# EAGLE board power_strip_monitor_V2 (EAGLE 6.4)
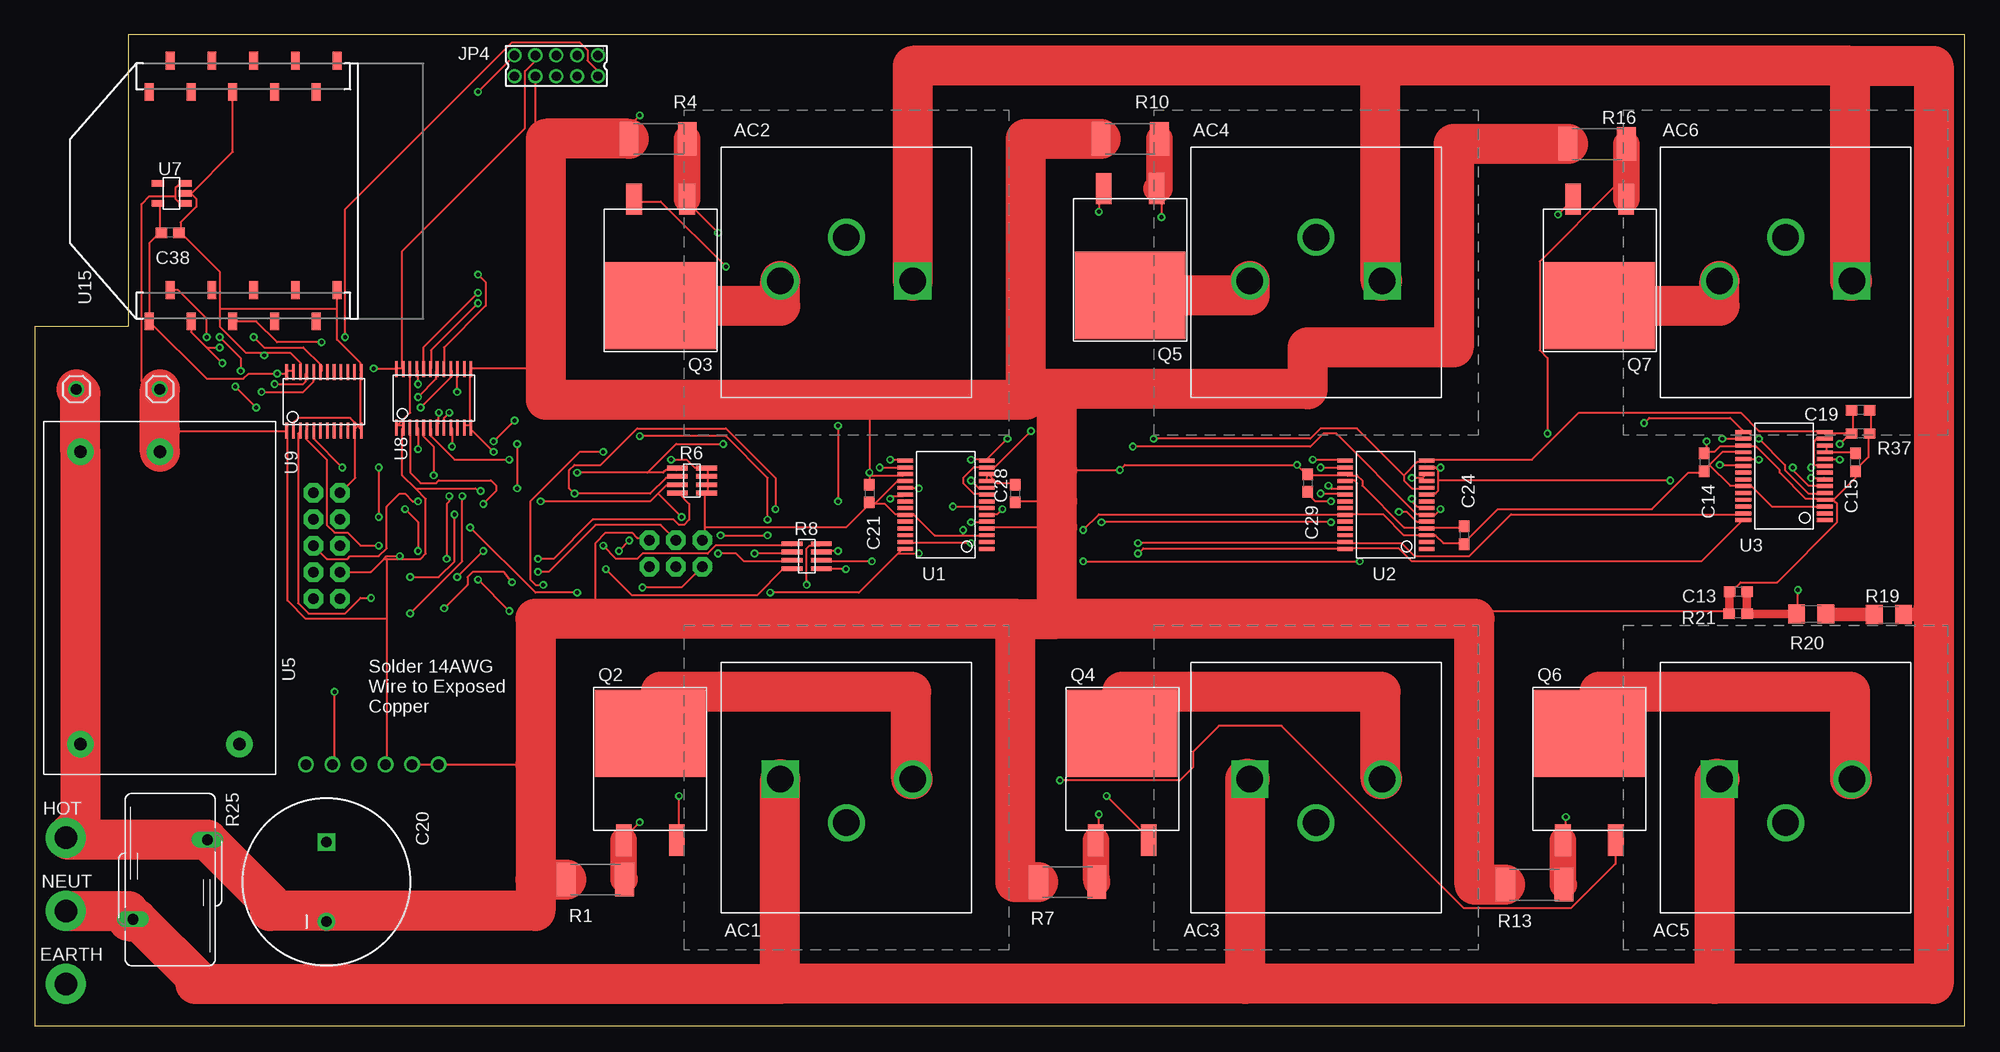
[diagram p0: board, top side]
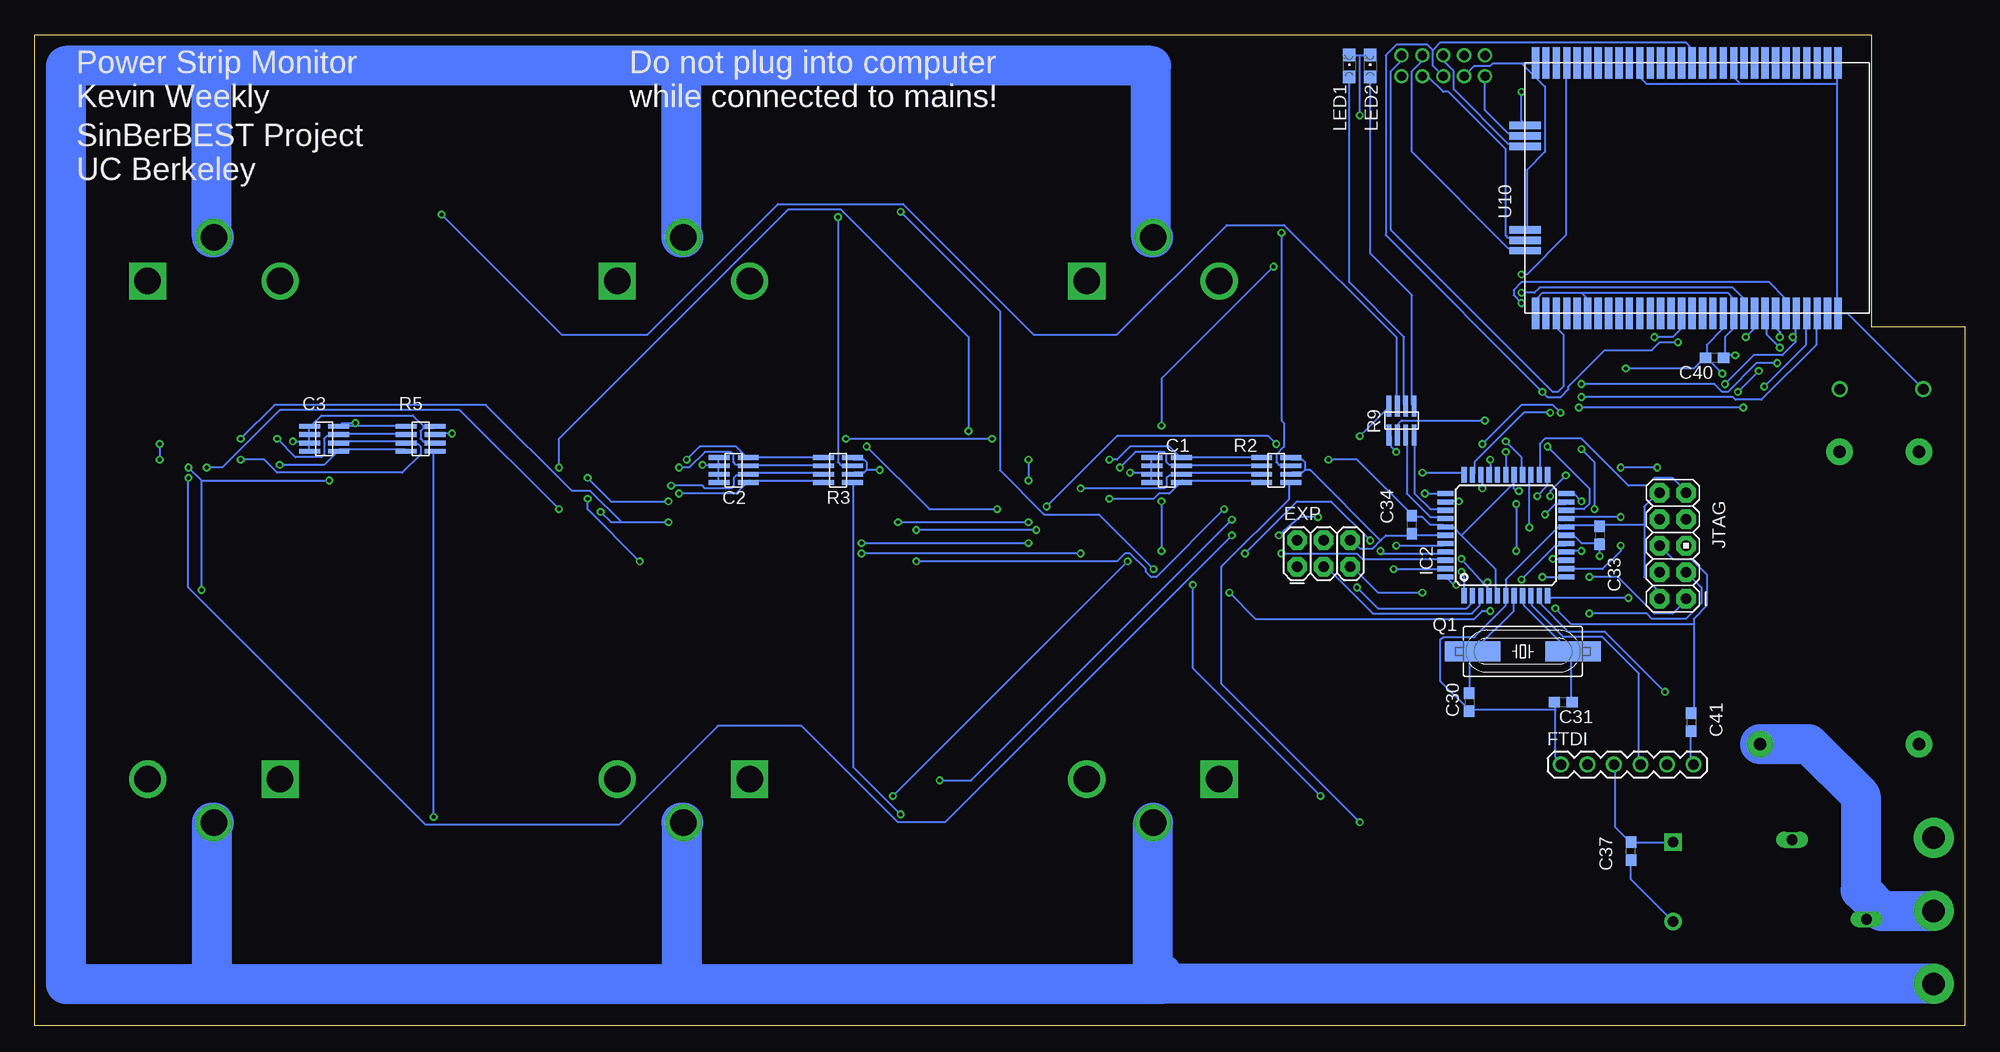
[diagram p1: board, bottom side, seen from below]

Size 185 x 95 mm. Coordinates in mm from the lower left corner, seen from the top.
Outline: 0,0 185,0 185,95 9,95 9,67 0,67 0,0
Copper layers (1+2*15+16): Top 0.0356mm / dielectric 0.2mm / GND 0.017mm / dielectric 1.5mm / VCC 0.017mm / dielectric 0.2007mm / Bottom 0.0356mm
Design rules "LaenPCBOrder *": minimum track width 6mil, minimum drill 13mil, track to track 6mil, track to pad 6mil, pad to pad 6mil, via to via 6mil, smd to smd 6mil, copper to edge 15mil, drill to drill 6mil, minimum pad ring 7mil, minimum via ring 7mil, stop-mask expansion 4mil, vias tented up to drill 0mil, thermal gap 10mil
Net classes: 0 default: width 0.203 mm, drill 0.381 mm, clearance 0.203 mm; 1 Evil_AC: width 0.254 mm, drill 0.381 mm, clearance 2.997 mm

## Footprints (pad centres in the part's own frame; a part is rotated, then mirrored left to right if it is on the bottom)
3-213598-2 = drill 2.54 square: 1 -6.35,0.813 | drill 2.54: 2 6.35,0.813; 3 0,-3.378
1206_NETWORK = smd 2 x 0.45: A1 -1.4,1.2; A2 1.4,1.2; B1 -1.4,0.4; B2 1.4,0.4; C1 -1.4,-0.4; C2 1.4,-0.4; D1 -1.4,-1.2; D2 1.4,-1.2
0603 = smd 1.1 x 1: 1 -0.85,0; 2 0.85,0
CPOL-RADIAL-1000UF-63V = drill 1.016 pad 1.651 square: 1 3.81,0 | drill 1.016 pad 1.676: 2 -3.81,0
14GAUGE_HOLE = drill 2.159 pad 3.81: P$1 0,0
2X3 = drill 1.016 pad 1.88 octagon: 1 0,0; 2 0,2.54; 3 2.54,0; 4 2.54,2.54; 5 5.08,0; 6 5.08,2.54
1X06 = drill 1.016: 1 0,0; 2 2.54,0; 3 5.08,0; 4 7.62,0; 5 10.16,0; 6 12.7,0
TQFP44 = smd 1.5 x 0.5: 1 -5.8,4; 2 -5.8,3.2; 3 -5.8,2.4; 4 -5.8,1.6; 5 -5.8,0.8; 6 -5.8,0; 7 -5.8,-0.8; 8 -5.8,-1.6; 9 -5.8,-2.4; 10 -5.8,-3.2; 11 -5.8,-4; 23 5.8,-4; 24 5.8,-3.2; 25 5.8,-2.4; 26 5.8,-1.6; 27 5.8,-0.8; 28 5.8,0; 29 5.8,0.8; 30 5.8,1.6; 31 5.8,2.4; 32 5.8,3.2; 33 5.8,4 | smd 0.5 x 1.5: 12 -4,-5.8; 13 -3.2,-5.8; 14 -2.4,-5.8; 15 -1.6,-5.8; 16 -0.8,-5.8; 17 0,-5.8; 18 0.8,-5.8; 19 1.6,-5.8; 20 2.4,-5.8; 21 3.2,-5.8; 22 4,-5.8; 34 4,5.8; 35 3.2,5.8; 36 2.4,5.8; 37 1.6,5.8; 38 0.8,5.8; 39 0,5.8; 40 -0.8,5.8; 41 -1.6,5.8; 42 -2.4,5.8; 43 -3.2,5.8; 44 -4,5.8
87758-1016 = drill 0.9 pad 1.27: 1 -4,-1; 2 -4,1; 3 -2,-1; 4 -2,1; 5 0,-1; 6 0,1; 7 2,-1; 8 2,1; 9 4,-1; 10 4,1
AVR_ICSP = drill 1.016 pad 1.88 octagon: 1 -1.27,5.08; 2 1.27,5.08; 3 -1.27,2.54; 4 1.27,2.54; 5 -1.27,0; 6 1.27,0; 7 -1.27,-2.54; 8 1.27,-2.54; 9 -1.27,-5.08; 10 1.27,-5.08
CHIPLED_0805 = smd 1.2 x 1.2: A 0,-1.05; C 0,1.05
HC49UP = smd 5.334 x 1.93: 1 -4.826,0; 2 4.826,0
D2PACK_NXP = smd 1.5 x 3: 1 -2.54,-10.225; 3 2.54,-10.225 | smd 10.6 x 8.35: 2 0,0
R2512 = smd 1.8 x 3.2: 1 -2.8,0; 2 2.8,0
1206 = smd 1.6 x 1.8: 1 -1.4,0; 2 1.4,0
S14K680 = drill 1.016 long: 1 -3.556,-3.81; 2 3.556,3.81
TESTPOINT-100MIL = drill 1.016: 2 0,0
SSOP28L_CIRRUS = smd 1.5 x 0.38: 1 -3.9,4.225; 2 -3.9,3.575; 3 -3.9,2.925; 4 -3.9,2.275; 5 -3.9,1.625; 6 -3.9,0.975; 7 -3.9,0.325; 8 -3.9,-0.325; 9 -3.9,-0.975; 10 -3.9,-1.625; 11 -3.9,-2.275; 12 -3.9,-2.925; 13 -3.9,-3.575; 14 -3.9,-4.225; 15 3.9,-4.225; 16 3.9,-3.575; 17 3.9,-2.925; 18 3.9,-2.275; 19 3.9,-1.625; 20 3.9,-0.975; 21 3.9,-0.325; 22 3.9,0.325; 23 3.9,0.975; 24 3.9,1.625; 25 3.9,2.275; 26 3.9,2.925; 27 3.9,3.575; 28 3.9,4.225
RAC01_02-SC = drill 1.2 pad 2.54: 1 -14,7.62; 2 -14,-7.62; 3 14,7.62; 4 14,0
TSOT23-5_LINEAR = smd 0.62 x 1.22: 1 -0.95,-1.31; 2 0,-1.31; 3 0.95,-1.31; 4 0.95,1.31; 5 -0.95,1.31
TSSOP24_TI = smd 1.55 x 0.25: 1 -2.8,3.575; 2 -2.8,2.925; 3 -2.8,2.275; 4 -2.8,1.625; 5 -2.8,0.975; 6 -2.8,0.325; 7 -2.8,-0.325; 8 -2.8,-0.975; 9 -2.8,-1.625; 10 -2.8,-2.275; 11 -2.8,-2.925; 12 -2.8,-3.575; 13 2.8,-3.575; 14 2.8,-2.925; 15 2.8,-2.275; 16 2.8,-1.625; 17 2.8,-0.975; 18 2.8,-0.325; 19 2.8,0.325; 20 2.8,0.975; 21 2.8,1.625; 22 2.8,2.275; 23 2.8,2.925; 24 2.8,3.575
LTP5901_MODULE = smd 3 x 0.7: 1 -12,13.5; 2 -12,12.5; 3 -12,11.5; 4 -12,10.5; 5 -12,9.5; 6 -12,8.5; 7 -12,7.5; 8 -12,6.5; 9 -12,5.5; 10 -12,4.5; 11 -12,3.5; 12 -12,2.5; 13 -12,1.5; 14 -12,0.5; 15 -12,-0.5; 16 -12,-1.5; 17 -12,-2.5; 18 -12,-3.5; 19 -12,-4.5; 20 -12,-5.5; 21 -12,-6.5; 22 -12,-7.5; 23 -12,-8.5; 24 -12,-9.5; 25 -12,-10.5; 26 -12,-11.5; 27 -12,-12.5; 28 -12,-13.5; 29 -12,-14.5; 30 -12,-15.5; 37 12,-15.5; 38 12,-14.5; 39 12,-13.5; 40 12,-12.5; 41 12,-11.5; 42 12,-10.5; 43 12,-9.5; 44 12,-8.5; 45 12,-7.5; 46 12,-6.5; 47 12,-5.5; 48 12,-4.5; 49 12,-3.5; 50 12,-2.5; 51 12,-1.5; 52 12,-0.5; 53 12,0.5; 54 12,1.5; 55 12,2.5; 56 12,3.5; 57 12,4.5; 58 12,5.5; 59 12,6.5; 60 12,7.5; 61 12,8.5; 62 12,9.5; 63 12,10.5; 64 12,11.5; 65 12,12.5; 66 12,13.5 | smd 0.7 x 3: 31 -6,-16.5; 32 -5,-16.5; 33 -4,-16.5; 34 4,-16.5; 35 5,-16.5; 36 6,-16.5
XBEE-SMD = smd 1.7 x 0.85: 1 -12.5,20; 2 -9.5,18; 3 -12.5,16; 4 -9.5,14; 5 -12.5,12; 6 -9.5,10; 7 -12.5,8; 8 -9.5,6; 9 -12.5,4; 10 -9.5,2; 11 12.5,2; 12 9.5,4; 13 12.5,6; 14 9.5,8; 15 12.5,10; 16 9.5,12; 17 12.5,14; 18 9.5,16; 19 12.5,18; 20 9.5,20

## Placement (x,y rotation side)
AC1  AC_OUTLET  [3-213598-2]  77.81,22.81 0 top
AC2  AC_OUTLET  [3-213598-2]  77.81,72.19 180 top
AC3  AC_OUTLET  [3-213598-2]  122.81,22.81 0 top
AC4  AC_OUTLET  [3-213598-2]  122.81,72.19 180 top
AC5  AC_OUTLET  [3-213598-2]  167.81,22.81 0 top
AC6  AC_OUTLET  [3-213598-2]  167.81,72.19 180 top
C1  10n  [1206_NETWORK]  76.5,53.25 180 bottom
C2  10n  [1206_NETWORK]  118,53.25 180 bottom
C3  10n  [1206_NETWORK]  157.25,56.25 180 bottom
C13  10n  [0603]  163.29,41.57 180 top
C14  .1u  [0603]  160,54 270 top
C15  .1u  [0603]  174.5,54 90 top
C19  10n  [0603]  175,59 180 top
C20  1000uF 10V  [CPOL-RADIAL-1000UF-63V]  27.97,13.79 90 top
C21  .1u  [0603]  80,51 270 top
C24  .1u  [0603]  137,47 270 top
C28  .1u  [0603]  94,51 90 top
C29  .1u  [0603]  122,52 270 top
C30  22p  [0603]  47.5,31 270 bottom
C31  22p  [0603]  38.5,31 180 bottom
C33  .1u  [0603]  35,47 270 bottom
C34  .1u  [0603]  53,48 90 bottom
C37  10u  [0603]  32.01,16.73 90 bottom
C38  10u  [0603]  13,76 180 top
C40  .1u  [0603]  24,64 180 bottom
C41  .1u  [0603]  26.24,29.09 270 bottom
EARTH  1P_HOLE  [14GAUGE_HOLE]  3,4 0 top
EXP  EXP  [2X3]  64,44 0 bottom
FTDI  [1X06]  38.71,25.02 0 bottom
HOT  1P_HOLE  [14GAUGE_HOLE]  3,18 0 top
IC2  ATMEGA644A  [TQFP44]  44,47 90 bottom
JP4  87758-1016  [87758-1016]  50,92 180 top
JTAG  JTAG  [AVR_ICSP]  28,46 180 bottom
LED1  [CHIPLED_0805]  59,92 0 bottom
LED2  [CHIPLED_0805]  57,92 0 bottom
NEUT  1P_HOLE  [14GAUGE_HOLE]  3,11 0 top
Q1  16.384MHz  [HC49UP]  42.37,35.87 180 bottom
Q2  BTA312B-800E  [D2PACK_NXP]  59,28 0 top
Q3  BTA312B-800E  [D2PACK_NXP]  60,69 180 top
Q4  BTA312B-800E  [D2PACK_NXP]  104.25,28 0 top
Q5  BTA312B-800E  [D2PACK_NXP]  105,70 180 top
Q6  BTA312B-800E  [D2PACK_NXP]  149,28 0 top
Q7  BTA312B-800E  [D2PACK_NXP]  150,69 180 top
R1  1m 1%  [R2512]  53.75,14 0 top
R2  220 1%  [1206_NETWORK]  66,53.25 180 bottom
R3  220 1%  [1206_NETWORK]  108,53.25 180 bottom
R4  1m 1%  [R2512]  59.75,85 0 top
R5  220 1%  [1206_NETWORK]  148,56.25 180 bottom
R6  10k  [1206_NETWORK]  63,52.25 0 top
R7  1m 1%  [R2512]  99,13.75 0 top
R8  100  [1206_NETWORK]  74,45 0 top
R9  100  [1206_NETWORK]  54,58 90 bottom
R10  1m 1%  [R2512]  105,85 0 top
R13  1m 1%  [R2512]  143.75,13.5 0 top
R16  1m 1%  [R2512]  149.75,84.5 0 top
R19  470k 200V  [1206]  177.71,39.4 0 top
R20  470k 200V  [1206]  170.26,39.45 180 top
R21  1k 1%  [0603]  163.25,39.5 180 top
R25  S14K680  [S14K680]  13,14 180 top
R37  1k 1%  [0603]  175,56.75 180 top
TP21  TESTPOINT100MIL  [TESTPOINT-100MIL]  12,61 0 top
TP24  TESTPOINT100MIL  [TESTPOINT-100MIL]  4,61 0 top
U1  CS5467  [SSOP28L_CIRRUS]  87.34,49.93 180 top
U2  CS5467  [SSOP28L_CIRRUS]  129.5,49.93 180 top
U3  CS5467  [SSOP28L_CIRRUS]  167.66,52.68 180 top
U5  RAC01_02-SC  [RAC01_02-SC]  12,41 90 top
U7  LT1761ES5-3.3  [TSOT23-5_LINEAR]  13.13,79.76 90 top
U8  SN74LVC4245A  [TSSOP24_TI]  38.26,60.14 90 top
U9  SN74LVC4245A  [TSSOP24_TI]  27.74,59.83 90 top
U10  LTP5901  [LTP5901_MODULE]  25.66,80.28 270 bottom
U15  XBEE-1B3  [XBEE-SMD]  31,80 90 top

## Library data of the parts
AC1-AC6 C1-C3 EARTH HOT NEUT Q2-Q7 R2 R3 R5 R6 R8 R9 U1-U3 U5 U7-U10 = Cool_Electricity
C13-C15 C19 C21 C24 C28-C31 C33 C34 C37 C38 C40 C41 Q1 R19-R21 R37 = SparkFun
C20 = SparkFun-Passives
EXP JTAG = SparkFun-Connectors
FTDI = custom
IC2 = atmel; MPN: ATMEGA644PV-10AU; OC_FARNELL: 1455123; OC_NEWARK: 58M3748
JP4 = con-molex; MF: MOLEX; MPN: 87758-1016; OC_FARNELL: 7472340; OC_NEWARK: 59J1558
LED1 LED2 = led
R1 R4 R7 R10 R13 R16 = rcl
R25 = varistor
TP21 TP24 = WSNlib
U15 = SparkFun-RF; PROD_ID: CONN-09042

## Nets
3.3V: C38.2 C40.2 JP4.7 U7.5 U8.23 U8.24 U9.23 U9.24 U10.55 U15.1
5V: C14.2 C20.1 C21.2 C24.2 C33.2 C34.2 C37.2 EXP.2 FTDI.3 IC2.5 IC2.17 IC2.27 IC2.38 JTAG.4 R6.A2 R6.B2 R6.C2 R6.D2 TP21.2 U1.3 U1.18 U1.23 U2.3 U2.18 U2.23 U3.3 U3.18 U3.23 U5.4 U7.1 U7.3 U8.1 U8.2 U8.22 U9.1
#CS1: IC2.33 R6.A1 U1.7
#CS2: IC2.34 R6.B1 U2.7
#CS3: IC2.35 R6.C1 U3.7
#CS_EXP: EXP.5 IC2.25
ATMEGA_TO_FTDI: FTDI.5 IC2.10
ATMEGA_TO_MOTE_3V: U8.21 U10.59 U15.3
ATMEGA_TO_MOTE_5V: IC2.12 U8.3
EARTH: AC1.3 AC2.3 AC3.3 AC4.3 AC5.3 AC6.3 EARTH.P$1
EXP_MISO: EXP.1 IC2.2
EXP_MOSI: EXP.4 IC2.1
EXP_SCK: EXP.3 IC2.3
FLASH_P_ENN: JP4.2 U10.51
FTDI_TO_ATMEGA: FTDI.4 IC2.9
GATE1: Q2.3 R8.A2
GATE2: Q3.3 R8.B2
GATE3: Q4.3 R8.C2
GATE4: Q5.3 R8.D2
GATE5: Q6.3 R9.A2
GATE6: Q7.3 R9.B2
GND: C1.A2 C1.B2 C1.C2 C1.D2 C2.A2 C2.B2 C2.C2 C2.D2 C3.A2 C3.B2 C3.C2 C3.D2 C13.2 C14.1 C15.1 C19.1 C20.2 C21.1 C24.1 C28.1 C29.1 C30.2 C31.2 C33.1 C34.1 C37.1 C38.1 C40.1 EXP.6 FTDI.1 FTDI.2 HOT.P$1 IC2.6 IC2.18 IC2.28 IC2.39 JP4.8 JTAG.2 JTAG.10 LED1.C LED2.C R1.1 R2.B1 R2.D1 R3.B1 R3.D1 R4.1 R5.B1 R5.D1 R7.1 R10.1 R13.1 R16.1 R21.2 R25.1 R37.1 TP24.2 U1.4 U1.17 U2.4 U2.17 U3.4 U3.17 U5.1 U5.3 U7.2 U8.11 U8.12 U8.13 U9.2 U9.11 U9.12 U9.13 U9.22 U10.1 U10.11 U10.20 U10.30 U10.34 U10.37 U10.42 U10.56 U10.66 U15.10 U15.16
HOT1: AC1.2 Q2.2
HOT2: AC2.2 Q3.2
HOT3: AC3.2 Q4.2
HOT4: AC4.2 Q5.2
HOT5: AC5.2 Q6.2
HOT6: AC6.2 Q7.2
HRET1: Q2.1 R1.2 R2.A1
HRET2: Q3.1 R2.C1 R4.2
HRET3: Q4.1 R3.A1 R7.2
HRET4: Q5.1 R3.C1 R10.2
HRET5: Q6.1 R5.A1 R13.2
HRET6: Q7.1 R5.C1 R16.2
I1+: C1.A1 R2.A2 U1.20
I1-: C1.B1 R2.B2 U1.19
I2+: C1.C1 R2.C2 U1.16
I2-: C1.D1 R2.D2 U1.15
I3+: C2.A1 R3.A2 U2.20
I3-: C2.B1 R3.B2 U2.19
I4+: C2.C1 R3.C2 U2.16
I4-: C2.D1 R3.D2 U2.15
I5+: C3.A1 R5.A2 U3.20
I5-: C3.B1 R5.B2 U3.19
I6+: C3.C1 R5.C2 U3.16
I6-: C3.D1 R5.D2 U3.15
IPCS_MISO: JP4.5 U10.33
IPCS_MOSI: JP4.4 U10.35
IPCS_SCK: JP4.3 U10.36
IPCS_SSN: JP4.1 U10.39
LED1: LED1.A R9.C2
LED2: LED2.A R9.D2
MISO: U1.6 U2.6 U3.6
MOSI: U1.27 U2.27 U3.27
MOTE_CLI_RX: JP4.10 U10.32
MOTE_CLI_TX: JP4.9 U10.31
MOTE_RADIO_INHIBIT_3V: U8.18 U10.64
MOTE_RADIO_INHIBIT_5V: IC2.30 U8.6
MOTE_RESETN_3V: JP4.6 U8.15 U10.15 U15.5
MOTE_RESETN_5V: IC2.20 U8.9
MOTE_RX_CTSN_3V: U9.19 U10.58
MOTE_RX_CTSN_5V: IC2.19 U9.5
MOTE_RX_RTSN_3V: U8.20 U10.57
MOTE_RX_RTSN_5V: IC2.15 U8.4
MOTE_SLEEPN_3V: U8.17 U10.27
MOTE_SLEEPN_5V: IC2.31 U8.7
MOTE_TIMEN_3V: U8.16 U10.63
MOTE_TIMEN_5V: IC2.32 U8.8
MOTE_TO_ATMEGA_3V: U9.21 U10.62 U15.2
MOTE_TO_ATMEGA_5V: IC2.11 U9.3
MOTE_TX_CTSN_3V: U8.19 U10.61
MOTE_TX_CTSN_5V: IC2.14 U8.5
MOTE_TX_RTSN_3V: U9.20 U10.60
MOTE_TX_RTSN_5V: IC2.13 U9.4
N$1: C30.1 IC2.7 Q1.2
N$2: R19.1 R20.1
N$3: C31.1 IC2.8 Q1.1
N$4: C15.2 U3.11 U3.12
N$6: IC2.40 R8.A1
N$7: IC2.41 R8.B1
N$8: IC2.42 R8.C1
N$10: IC2.43 R8.D1
N$11: C29.2 U2.11 U2.12
N$12: IC2.44 R9.A1
N$13: IC2.26 R9.B1
N$14: IC2.36 R9.D1
N$15: C28.2 U1.11 U1.12
N$16: IC2.37 R9.C1
NEUTRAL [Evil_AC]: AC1.1 AC2.1 AC3.1 AC4.1 AC5.1 AC6.1 NEUT.P$1 R19.2 R25.2 U5.2
RST: C41.1 IC2.4 JTAG.6 R6.D1
RTS#: C41.2 FTDI.6
SCLK: U1.5 U2.5 U3.5
TCK: IC2.21 JTAG.1
TDI: IC2.24 JTAG.9
TDO: IC2.23 JTAG.3
TMS: IC2.22 JTAG.5
V+: C13.1 R20.2 R21.1 U1.9 U1.13 U2.9 U2.13 U3.9 U3.13
V-: C19.2 R37.2 U1.10 U1.14 U2.10 U2.14 U3.10 U3.14
XIN: IC2.16 U1.28 U2.28 U3.28

## Tracks (layer width: path | path; a pad name or v marks a point on that pad's centre or on a via)
3.3V  (via drill 0.38)
  Top 0.203: U9.23 24.75,62.75 24.25,62.75 U9.24 24.25,62.5 v23.25,62.5 20.5,62.5 20,62 16.5,62 U15.1 11,75 12,76 | 12,76 12,78.75 U7.5 | 12,76 C38.2 | 35.25,63 34.75,63 | v32.5,63 34.75,63 | 34.75,63 U8.24 | JP4.7 48,92.5 47,91.5 47,86 35.25,74.25 35.25,63 | 35.25,63 U8.23
  Bottom 0.203: 24.75,64 24.75,65.25 23.25,66.75 23.25,68.25 U10.55 | v32.5,63 26,63 25,64 C40.2 24.75,64 | 24.75,64 v23.25,62.5
5V  (via drill 0.38)
  Top 0.203: 160.5,53.75 161.75,55 163.75,55 U3.18 | 160.5,53.75 160,53.25 C14.2 160,53 158.5,53 155,49.5 140.25,49.5 137,46.25 | 160.5,53.75 162.5,51.75 163.75,51.75 U3.23 164,51.75 164.5,51.75 166.5,49.75 171.5,49.75 U3.3 | 137,46.25 135,46.25 134.25,47 133.5,47 U2.3 133.25,47 131.25,47 129.25,49 126.75,49 | 126.75,49 125.75,49 U2.23 125.5,49 102,49 v100.5,47.5 | 126.75,49 126.75,52 126.5,52.25 125.75,52.25 U2.18 | 137,46.25 C24.2 | 64.25,47.75 64.25,47 64,46.75 EXP.2 | 64.25,47.75 64.25,51 R6.D2 64.5,51.25 64.5,51.75 R6.C2 64.5,52 64.5,52.5 R6.B2 64.5,52.75 64.5,53.25 R6.A2 64.25,53.5 63.25,53.5 62.5,54.25 v61,54.25 | 80.5,50 81.5,50 82.5,49 83.25,49 U1.23 83.5,49 84.25,49 86.25,47 89,47 | 80.5,50 80,50 | 80.5,50 82.75,52.25 83.25,52.25 U1.18 | 89,47 91,47 U1.3 | 64.25,47.75 77.75,47.75 80,50 | 80,50 C21.2 | 13.5,79.5 13.5,80.25 13.75,80.5 14.25,80.5 U7.3 | 13.5,79.5 13.5,79.25 13.75,79 14.25,79 U7.1 | 12,57 24.25,57 | 13.5,79.5 11,79.5 10.25,78.75 10.25,61.75 TP21.2 | 34.75,57.5 35.25,57.5 U8.2 35.25,57.25 35.25,52.75 36.5,51.5 | 34.75,57.5 36,58.75 36,62.75 U8.22 | 34.75,57.5 U8.1 | v35,45 33.75,45 33.5,44.75 | 33.5,44.75 32.25,43.5 29.5,43.5 JTAG.4 | 36.5,51.5 37.5,50.5 37.5,45.25 37,44.75 33.75,44.75 | 33.5,44.75 33.75,44.75 | 33.75,44.75 33.75,39 | 33.75,39 33.75,25.25 FTDI.3 | 36.5,51.5 42.25,51.5 42.5,51.25 v42.75,51.25 | 24.25,57 24.25,40.75 26,39 33.75,39 | 24.25,57 U9.1 | 89,47 v89,47.5
  Top 3.81: U5.4 12,57 TP21.2
  Bottom 0.203: 48.25,47 49,47.75 49.75,47.75 IC2.38 50,48 51.25,48 52,48.75 53,48.75 C34.2 53,49 58.25,54.25 v61,54.25 | 48.25,47 45,43.75 45,41.25 IC2.5 | 43.25,52 43.25,52.75 IC2.27 | 48.25,47 43.25,52 | C20.1 28,17.5 32,17.5 C37.2 32.25,17.75 33.5,19 33.5,25 FTDI.3 | IC2.17 37.5,47 36.75,46.25 35,46.25 C33.2 v35,45 | v42.75,51.25 43,51.25 43.25,51.5 43.25,52 | v89,47.5 v100.5,47.5
#CS1  (via drill 0.38)
  Top 0.203: 58.75,53 60.25,53 60.5,53.25 61.5,53.25 R6.A1 | 58.75,53 v52,53 | v88,49.75 91,49.75 U1.7 | v66,55.75 61.5,55.75 58.75,53
  Bottom 0.203: v52,53 48,53 IC2.33 | v88,49.75 81.25,56.5 66.75,56.5 v66,55.75
#CS2  (via drill 0.38)
  Top 0.203: R6.B1 61.5,52.5 60.5,52.5 59,51 v51.75,51 51.25,51.5 51.25,53.25 51.75,53.75 54.25,53.75 57.75,57.25 66.25,57.25 71,52.5 v71,49.5 | v132,50.5 132,50.25 132.5,49.75 133.25,49.75 U2.7 | v100.5,44.5 v127,44.5
  Bottom 0.203: v51.75,51 IC2.34 | v132,50.5 132,49.5 v127,44.5 | v100.5,44.5 81.25,44.5 80.5,45.25 80,45.25 78.5,43.75 78.5,43.5 78,43 77.5,43 v71,49.5
#CS3  (via drill 0.38)
  Top 0.203: v48.5,50.25 59,50.25 59.75,51 | 59.75,51 60.5,51.75 61.5,51.75 R6.C1 | v170.25,52.5 171.5,52.5 U3.7 | v65.75,47 v70.25,47 | 59.75,51 v62,48.75
  Bottom 0.203: v48.5,50.25 49.75,50.25 IC2.35 | v170.25,52.5 170.25,42 147.5,19.25 129,19.25 119.5,28.75 111.5,28.75 102.25,19.5 97.75,19.5 v70.25,47 | v65.75,47 63.75,48.75 v62,48.75
#CS_EXP  (via drill 0.38)
  Top 0.203: v41.75,47.75 48,41.5 v52,41.5
  Bottom 0.203: v41.75,47.75 41.75,52.75 IC2.25 | v52,41.5 56.25,41.5 58.75,44 EXP.5
ATMEGA_TO_FTDI  (via drill 0.38)
  Top 0.203: v28.75,32 28.75,25.25 FTDI.5
  Bottom 0.203: v28.75,32 34.5,37.75 38,37.75 40.75,40.5 40.75,41 IC2.10
ATMEGA_TO_MOTE_3V  (via drill 0.38)
  Top 0.203: v36.75,61.5 36.75,62.75 U8.21 | 16.5,65 15,66.5 U15.3 | 16.5,65 v18,63.5 | 16.5,65 v17.75,65
  Bottom 0.203: v36.75,61.5 24,61.5 23.25,60.75 22.75,60.75 20,63.5 v18,63.5 | v17.75,65 19,66.25 19,68.25 U10.59
ATMEGA_TO_MOTE_5V  (via drill 0.38)
  Top 0.203: v43,45.5 v40.5,43 | v43,50 44.25,51.25 44.25,51.75 43.75,52.25 38.75,52.25 38.5,52 37,52 36,53 36,57.25 U8.3
  Bottom 0.203: v40.5,43 IC2.12 | v43,50 v43,45.5
EARTH
  Bottom 3.81: EARTH.P$1 77.81,4 77.81,5 | 77.81,5 AC1.3 | AC3.3 123,19.44 123,4 | 168,4 123,4 | 123,4 77,4 77,5 77.81,5 | AC5.3 168,19.44 168,4 | AC6.3 168,75.56 168,92 | 168,92 182,92 182,4 168,4 | AC4.3 123,75.56 123,92 | 123,92 168,92 | AC2.3 78,75.56 78,92 123,92
EXP_MISO  (via drill 0.38)
  Top 0.203: v58.25,42 62,42 EXP.1
  Bottom 0.203: v58.25,42 56.25,40 47.75,40 47.25,40.5 47.25,41 IC2.2
EXP_MOSI  (via drill 0.38)
  Top 0.203: v48.25,43.5 49.25,43.5 53.75,48 60,48 EXP.4
  Bottom 0.203: IC2.1 48,43 v48.25,43.5
EXP_SCK
  Bottom 0.203: IC2.3 46.5,41 46.5,40.25 47.25,39.5 56.75,39.5 61.25,44 EXP.3
FLASH_P_ENN  (via drill 0.38)
  Top 0.203: JP4.2 54,91.5 53,92.5 53,93.5 52.25,94.25 45.75,94.25 29.75,78.25 v29.75,66
  Bottom 0.203: v29.75,66 28,66 27.25,66.75 27.25,68.25 U10.51
FTDI_TO_ATMEGA
  Bottom 0.203: IC2.9 41.5,41 41.5,40.25 38.5,37.25 34.75,37.25 31.25,33.75 31.25,25.25 FTDI.4
GATE1  (via drill 0.38)
  Top 0.203: v74,42.25 74,45.75 74.25,46 75.25,46 R8.A2 | v61.75,22 61.75,18 Q2.3
  Bottom 0.203: v74,42.25 74,34.25 v61.75,22
GATE2  (via drill 0.38)
  Top 0.203: v77,45.5 75.5,45.5 R8.B2 | v77,57.5 v77,50.25 | v66.25,72.75 60,79 57.5,79 Q3.3
  Bottom 0.203: v77,50.25 v77,45.5 | v77,57.5 77,62 v66.25,72.75
GATE3  (via drill 0.38)
  Top 0.203: v80.25,44.5 75.5,44.5 R8.C2 | v102.75,22 106.75,18 Q4.3
  Bottom 0.203: v102.75,22 v80.25,44.5
GATE4  (via drill 0.38)
  Top 0.203: v77.75,43.75 75.5,43.75 R8.D2 | v102,78 102,79.75 102.25,80 Q5.3
  Bottom 0.203: v77.75,43.75 83,49 88.25,49 92.5,53.25 92.5,68.5 v102,78
GATE5  (via drill 0.38)
  Top 0.203: v58,56.5 66.25,56.5 70.25,52.5 v70.25,48.5 | v98.25,23.5 109.75,23.5 111,24.75 111,26.25 113.5,28.75 119.5,28.75 137,11.25 147.25,11.25 151.5,15.5 151.5,17.75 Q6.3
  Bottom 0.203: v58,56.5 55.25,59.25 R9.A2 | v70.25,48.5 95.25,23.5 v98.25,23.5
GATE6  (via drill 0.38)
  Top 0.203: v146,77.75 147.25,79 Q7.3
  Bottom 0.203: v146,77.75 134.5,66.25 126.25,66.25 113.75,78.75 101.75,78.75 89.25,66.25 81.25,66.25 70.75,76.75 65.25,76.75 54.5,66 54.5,59.5 R9.B2
GND  (via drill 0.38)
  Top 0.203: 31.25,57.25 31,57.5 | 31,57.5 30.25,58.25 25.25,58.25 24.75,57.75 24.75,57.25 U9.2 | 31,57.5 30.75,57.25 U9.11 30.75,57 30.75,52.5 29.5,51.25 JTAG.10 | 31.25,57.25 31.25,62.5 U9.13 31.25,62.75 31.25,63.5 29,65.75 29,68.75 | 31.25,57.25 U9.12 | 29,68.75 U15.10 | 14,76 14,77 15.5,78.5 15.5,79.25 15,79.75 | 15,79.75 14.5,79.75 U7.2 15,79.75 | 22,64.5 20.25,64.5 17.75,67 17.75,68.75 | 22,64.5 24.5,64.5 25.5,63.5 25.5,62.75 U9.22 | 17.75,68.75 17.75,72.25 14,76 | 14,76 C38.1 | U15.16 19,83.75 15,79.75 | 22,64.5 v22,64.25 | 17.75,68.75 29,68.75 | 160.25,55 161,55 161.5,55.5 163.75,55.5 U3.17 164,55.5 165,55.5 167.25,53.25 167.25,53 169.75,50.5 171.5,50.5 U3.4 171.75,50.5 172.5,50.5 | 160.25,55 160,55 C14.1 160.25,55 | C19.1 176,59 176,56.75 R37.1 175.75,56.75 175.75,54.5 174.5,53.25 C15.1 174.5,52.5 172.5,50.5 | 160.25,55 v160.25,56 | C24.1 137,47.75 133.5,47.75 U2.4 133.25,47.75 131.25,47.75 127.25,51.75 127.25,52.25 126.75,52.75 125.75,52.75 U2.17 125.5,52.75 122,52.75 | 122,52.75 v121,53.75 104.5,53.75 v104,53.25 98,53.25 | 122,52.75 C29.1 | FTDI.2 36.25,25 38.5,25 FTDI.1 38.75,25 48,25 | v44,55 41.75,57.25 U8.12 41.75,57.5 | 41.75,57.5 41.25,57.5 U8.11 | 41.75,57.5 41.75,62.75 U8.13 41.75,63 49,63 | 98,50.25 94,50.25 C28.1 | 80,60 v80,53 80,52.75 | 80,52.75 C21.1 | 98,47.75 91.25,47.75 U1.4 | 80,52.75 83.25,52.75 U1.17 | R21.2 162,39.75 139.75,39.75 138,39 | v58,87.25 57.5,86.75 R4.1 | JP4.8 48,86.5 49,85 | C20.2 28,10 28,11 | 53.75,39 53.75,46.25 54.75,47.25 57.25,47.25 57.75,46.75 58.75,46.75 EXP.6 | 172.5,50.5 172.5,50.25 172.75,50 172.75,48.25 167,42.5 163.5,42.5 162.75,41.75 C13.2
  Top 0.813: R21.2 162.4,41.36 C13.2
  Top 3.81: R7.1 94,13.75 94,39 | 94,39 53.75,39 48,39 48,25 48,14 | 48,14 R1.1 | R13.1 138,13.5 138,39 98,39 | R16.1 136,84.5 136,65 122,65 122,61 98,61 | 98,61 95,61 | 95,61 95,85 R10.1 | R4.1 49,85 49,63 49,60 80,60 95,60 95,61 | 48,14 48,11 28,11 22.56,11 22.56,11.81 R25.1 3.19,17.81 HOT.P$1 4.38,19.38 U5.1 U5.3 4.38,60.62 TP24.2 | 94,39 98,39 | 98,39 98,47.75 98,50.25 98,53.25 98,61
  Bottom 0.203: 35,48 38,48 IC2.18 | IC2.18 38.25,47.75 39,47.75 44,42.75 IC2.6 44,40.25 47,37.25 50,37.25 50.25,37 50.25,33 47.5,30.25 | 38.25,48 IC2.18 | 30.75,48 30.75,49.75 29.5,51 JTAG.10 | 30.75,48 30.75,43 29.5,41.75 29.5,41 JTAG.2 | 30.75,48 35,48 | 35,48 C33.1 | 23,64.25 23,66 22.25,66.75 22.25,68.25 U10.56 22.25,68.5 22.25,69.75 22.75,70.25 36.75,70.25 | 23,64.25 23,64 C40.1 23,64.25 | 36.75,70.25 36.25,69.75 36.25,68.5 U10.42 | 36.75,70.25 40.5,70.25 41,69.75 41,68.5 U10.37 | v22,64.25 23,64.25 | 147.75,57.25 148,57 148,56.25 147.75,56 146.75,56 R5.B1 | 147.75,57.25 146.75,57.25 R5.D1 | C3.A2 158.75,55.25 158.75,55.75 C3.B2 158.75,56 | 158.75,56 158.75,56.5 C3.C2 158.75,56.75 158.75,57.25 C3.D2 158.5,57.5 157.5,58.5 148.75,58.5 147.75,57.5 147.75,57.25 | v160.25,56 158.75,56 | 63.25,53.25 63.5,53 64.5,53 R2.B1 | 63.25,53.25 63.25,54 63.5,54.25 64.5,54.25 R2.D1 | 53,47 50,47 IC2.39 | 53,47 55.5,47 56,46.5 | 56,46.5 56.75,45.75 58,45.75 58.75,46.5 EXP.6 | 53,47 C34.1 | 63.25,53.25 62.75,53.25 56,46.5 | C2.A2 119.5,52.25 119.5,52.75 C2.B2 119.5,53 119.5,53.5 C2.C2 119.5,53.75 | 119.5,53.75 119.5,54.25 C2.D2 | v121,53.75 119.5,53.75 | 39.25,30.25 39.25,25.75 38.75,25.25 FTDI.1 | 39.25,30.25 39.25,31 C31.2 | 39.25,30.25 47.5,30.25 | v44,55 44,53 IC2.28 | C37.1 32,15.75 32,14 28,10 C20.2 | C1.A2 78,52.25 78,52.75 C1.B2 78,53 | C1.D2 78,54.25 78,53.75 C1.C2 78,53.5 78,53 | 105.25,53.25 105.5,53 106.5,53 R3.B1 | 105.25,53.25 105.25,54 105.5,54.25 106.5,54.25 R3.D1 | 58,93 59,93 LED1.C | 58,93 57,93 LED2.C | v58,87.25 58,93 | v104,53.25 105.25,53.25 | v80,53 78,53 | TP24.2 11.25,68.25 12,68.25 U10.66 12.25,68.5 12.25,90.25
  Bottom 0.203: 12.25,90.25 12.25,92.25 U10.1 | 21.5,90.25 22,90.75 22,92.25 U10.11 | 12.25,90.25 21.5,90.25 | 21.5,90.25 30.5,90.25 31,90.75 31,92.25 U10.20 | 42.5,92.25 45.25,92.25 45.5,92 47,92 JP4.8 | 42.5,92.25 41.25,92.25 U10.30 | 42.5,92.25 40.25,90 40.25,83.75 42,82 42,76.5 U10.34 | 47.5,30.25 C30.2
HOT1
  Top 3.81: AC1.2 84,23.63 84,32 60,32 60,27 59,27 Q2.2
HOT2
  Top 3.81: Q3.2 71.47,69 AC2.2
HOT3
  Top 3.81: AC3.2 129,23.63 129,32 104.25,32 Q4.2
HOT4
  Top 3.81: Q5.2 116.47,70 AC4.2
HOT5
  Top 3.81: AC5.2 174,23.63 174,32 150,32 150,28 Q6.2
HOT6
  Top 3.81: Q7.2 161.46,69 AC6.2
HRET1  (via drill 0.38)
  Top 0.203: v58,19.5 57.25,18.75 Q2.1
  Top 2.54: R1.2 56.46,14 Q2.1
  Bottom 0.203: v58,19.5 71.25,32.75 71.25,44 64.75,50.5 64.75,52 R2.A1
HRET2  (via drill 0.38)
  Top 0.203: v65.5,76 63.25,78.25 Q3.1
  Top 2.54: Q3.1 R4.2
  Bottom 0.203: v65.5,76 65.5,58 65.25,57.75 65.25,55.5 66,54.75 66,54 65.75,53.75 64.75,53.75 R2.C1
HRET3  (via drill 0.38)
  Top 0.203: v102,20.25 102,19 Q4.1
  Top 2.54: R7.2 101.71,14.25 Q4.1
  Bottom 0.203: v102,20.25 106.5,24.75 106.5,52 R3.A1
HRET4  (via drill 0.38)
  Top 0.203: v108,77.5 108,79 Q5.1
  Top 2.54: Q5.1 107.8,80.22 R10.2
  Bottom 0.203: v108,77.5 108,54 107.75,53.75 106.75,53.75 R3.C1
HRET5  (via drill 0.38)
  Top 0.203: v146.75,20 146.75,19 Q6.1
  Top 2.54: R13.2 146.46,13.5 Q6.1
  Bottom 0.203: v146.75,20 146.75,55 R5.A1
HRET6  (via drill 0.38)
  Top 0.203: v145,56.75 145,64 144.25,64.75 144.25,73.25 151.5,80.5 152.55,80.5
  Top 2.54: Q7.1 152.55,80.5 R16.2
  Bottom 0.203: v145,56.75 146.5,56.75 R5.C1
I1+  (via drill 0.38)
  Top 0.203: v82,50.5 82.25,50.75 83.25,50.75 U1.20
  Bottom 0.203: v82,50.5 77.75,50.5 77.25,51 76.25,51 75.25,52 C1.A1 75,52.25 67.5,52.25 R2.A2
I1-  (via drill 0.38)
  Top 0.203: v84.75,51.5 83.5,51.5 U1.19
  Bottom 0.203: v84.75,51.5 76.75,51.5 76.5,51.75 76.5,52.5 76.25,52.75 75.25,52.75 C1.B1 75,53 67.5,53 R2.B2
I2+  (via drill 0.38)
  Top 0.203: v81,53.5 83.25,53.5 U1.16
  Bottom 0.203: v81,53.5 79.5,55 76.75,55 76.5,54.75 76.5,54 76.25,53.75 75.25,53.75 C1.C1 75,53.75 67.5,53.75 R2.C2
I2-  (via drill 0.38)
  Top 0.203: v82,54.25 83.25,54.25 U1.15
  Bottom 0.203: v82,54.25 81.25,54.25 80,55.5 76.25,55.5 75.25,54.5 C1.D1 75,54.5 67.5,54.5 R2.D2
I3+  (via drill 0.38)
  Top 0.203: v123.25,51 125.5,51 U2.20
  Bottom 0.203: v123.25,51 117.75,51 116.75,52 C2.A1 116.5,52.25 109.5,52.25 R3.A2
I3-  (via drill 0.38)
  Top 0.203: v124,51.75 124.25,51.5 125.5,51.5 U2.19
  Bottom 0.203: v124,51.75 121,51.75 120.75,51.5 118.25,51.5 118,51.75 118,52.5 117.75,52.75 116.75,52.75 C2.B1 116.5,53 109.5,53 R3.B2
I4+  (via drill 0.38)
  Top 0.203: v123.25,53.5 125.5,53.5 U2.16
  Bottom 0.203: v123.25,53.5 122.25,53.5 120.75,55 118.25,55 118,54.75 118,54 117.75,53.75 116.75,53.75 C2.C1 116.5,53.75 109.5,53.75 R3.C2
I4-  (via drill 0.38)
  Top 0.203: v122.5,54.25 125.5,54.25 U2.15
  Bottom 0.203: v122.5,54.25 121.25,55.5 117.75,55.5 116.75,54.5 C2.D1 116.5,54.5 109.5,54.5 R3.D2
I5+  (via drill 0.38)
  Top 0.203: v161.5,53.75 163.75,53.75 U3.20
  Bottom 0.203: v161.5,53.75 157.25,53.75 156,55 C3.A1 155.75,55.25 149.5,55.25 R5.A2
I5-  (via drill 0.38)
  Top 0.203: v165.25,54.25 164,54.25 U3.19
  Bottom 0.203: v165.25,54.25 163,54.25 161.75,53 149.75,53 148,54.75 148,55.5 148.25,55.75 149.25,55.75 R5.B2 149.5,56 155.75,56 C3.B1
I6+  (via drill 0.38)
  Top 0.203: v161.75,56.25 U3.16
  Bottom 0.203: v161.75,56.25 160,54.5 157.5,54.5 157.25,54.75 157.25,56.25 157,56.5 156,56.5 C3.C1 155.75,56.75 149.5,56.75 R5.C2
I6-  (via drill 0.38)
  Top 0.203: v154.25,57.75 154.75,58.25 162.5,58.25 163.75,57 U3.15
  Bottom 0.203: v154.25,57.75 155.5,57.75 155.75,57.5 | 155.75,57.5 149.5,57.5 R5.D2 | 155.75,57.5 C3.D1
IPCS_MISO
  Bottom 0.203: JP4.5 50,92.5 49,91.5 49,89.75 43.75,84.5 42.25,84.5 U10.33
IPCS_MOSI
  Bottom 0.203: JP4.4 51.5,91 50,89.5 49.5,89.5 44,84 44,75.75 43.75,75.5 42.25,75.5 U10.35
IPCS_SCK
  Bottom 0.203: JP4.3 52,92.5 53,91.5 53,83.75 43.75,74.5 42.25,74.5 U10.36
IPCS_SSN
  Bottom 0.203: JP4.1 54,92.5 55,91.5 55,76.25 39.5,60.75 39,60.75 38.5,61.25 38.5,66.25 39,66.75 39,68.25 U10.39
LED1
  Bottom 0.203: LED1.A 59,71.25 53.75,66 53.75,59.5 R9.C2
LED2
  Bottom 0.203: LED2.A 57,74 53,70 53,59.5 R9.D2
MISO  (via drill 0.38)
  Top 0.203: v92.75,49.5 92.25,49 91.25,49 U1.6 | v105.25,55.5 122.25,55.5 123.5,56.75 124.75,56.75 132.5,49 133.25,49 U2.6 133.5,49 134.25,49 v134.75,49.5 | v168.5,53.5 168.5,53.25 170,51.75 171.5,51.75 U3.6
  Bottom 0.203: v92.75,49.5 99.25,49.5 v105.25,55.5 | v168.5,53.5 167,53.5 161.5,59 144.25,59 v134.75,49.5
MOSI  (via drill 0.38)
  Top 0.203: v89.75,46.25 83.5,46.25 U1.27 | v105.75,46.25 125.5,46.25 U2.27 125.75,46.25 131,46.25 132.25,45 137.5,45 141.5,49 163.75,49 U3.27
  Bottom 0.203: v105.75,46.25 v89.75,46.25
MOTE_CLI_RX
  Bottom 0.203: JP4.10 46,87.75 43.75,85.5 42.25,85.5 U10.32
MOTE_CLI_TX  (via drill 0.38)
  Top 0.203: v42.5,89.5 JP4.9
  Bottom 0.203: v42.5,89.5 42.5,86.75 42.25,86.5 U10.31
MOTE_RADIO_INHIBIT_3V  (via drill 0.38)
  Top 0.203: v36.75,60.25 38.5,62 38.5,62.75 U8.18
  Bottom 0.203: v36.75,60.25 22.25,60.25 22,60 19.5,60 14.25,65.25 14.25,68.25 U10.64
MOTE_RADIO_INHIBIT_5V  (via drill 0.38)
  Top 0.203: v45.5,54.25 40.25,54.25 38,56.5 38,57.25 U8.6
  Bottom 0.203: v45.5,54.25 45.5,53 IC2.30
MOTE_RESETN_3V  (via drill 0.38)
  Top 0.203: v40.5,60.75 40.5,62.75 U8.15 | U15.5 21.25,67.5 23.25,65.5 v27.5,65.5
  Bottom 0.203: 51,93.5 51.5,94 54.5,94 55.5,93 55.5,75.75 v40.5,60.75 40,60.25 38.75,60.25 38,61 38,61.25 34.5,64.75 30,64.75 29.25,65.5 v27.5,65.5 | 51,93.5 51,92 JP4.6 | 51,93.5 50.25,94.25 26.75,94.25 26.25,93.75 26.25,92.5 U10.15
MOTE_RESETN_5V  (via drill 0.38)
  Top 0.203: v40,55.5 40,57.25 U8.9
  Bottom 0.203: v40,55.5 36,51.5 36,50 36.5,49.5 38,49.5 IC2.20
MOTE_RX_CTSN_3V  (via drill 0.38)
  Top 0.203: v21,66 22,65 25.75,65 27.5,63.25 27.5,62.75 U9.19
  Bottom 0.203: v21,66 20.25,66.75 20.25,68.25 U10.58
MOTE_RX_CTSN_5V  (via drill 0.38)
  Top 0.203: v33,53.5 v33,48.75 | v29.5,53.5 26.75,56.25 26.75,57 U9.5
  Bottom 0.203: v33,48.75 38,48.75 IC2.19 | v29.5,53.5 v33,53.5
MOTE_RX_RTSN_3V  (via drill 0.38)
  Top 0.203: v42.5,70.25 37.25,65 37.25,63 U8.20
  Bottom 0.203: v42.5,70.25 41.25,70.25 40.75,70.75 22.25,70.75 21.25,69.75 21.25,68.5 U10.57
MOTE_RX_RTSN_5V  (via drill 0.38)
  Top 0.203: v36.75,45.5 36.75,48.25 v35.5,49.5 | v36.75,55.25 36.75,57.25 U8.4
  Bottom 0.203: v36.75,45.5 38,45.5 IC2.15 | v35.5,49.5 35.5,54 v36.75,55.25
MOTE_SLEEPN_3V  (via drill 0.38)
  Top 0.203: v42.5,72 43.25,71.25 43.25,69 39.25,65 39.25,63 U8.17
  Bottom 0.203: v42.5,72 42,72 38.25,75.75 38.25,92.25 U10.27
MOTE_SLEEPN_5V  (via drill 0.38)
  Top 0.203: v46.25,55.75 v46.25,51.5 | v38.75,58.75 38.75,57.75 38.5,57.5 U8.7
  Bottom 0.203: v46.25,51.5 46.25,52.75 IC2.31 | v46.25,55.75 42.5,59.5 39.5,59.5 v38.75,58.75
MOTE_TIMEN_3V  (via drill 0.38)
  Top 0.203: v37,59.25 40,62.25 40,62.75 U8.16 | v19.25,61.25 v21.25,59.25
  Bottom 0.203: v21.25,59.25 v37,59.25 | v19.25,61.25 15.25,65.25 15.25,68.25 U10.63
MOTE_TIMEN_5V  (via drill 0.38)
  Top 0.203: v39.75,58.75 39.25,58.25 39.25,57.5 U8.8
  Bottom 0.203: v39.75,58.75 42.25,58.75 47,54 47,53 IC2.32
MOTE_TO_ATMEGA_3V  (via drill 0.38)
  Top 0.203: v23,61.5 25.75,61.5 26,61.75 26,62.5 U9.21 | U15.2 13.75,70.5 16.5,67.75 v16.5,66
  Bottom 0.203: v23,61.5 20.25,64.25 17.5,64.25 16.25,65.5 16.25,66 | 16.25,66 16.25,68.25 U10.62 | 16.25,66 v16.5,66
MOTE_TO_ATMEGA_5V  (via drill 0.38)
  Top 0.203: v32.25,41 31.25,41 29.75,39.5 26.25,39.5 25.25,40.5 25.25,56.75 25.5,57 U9.3
  Bottom 0.203: v32.25,41 40,41 IC2.11
MOTE_TX_CTSN_3V  (via drill 0.38)
  Top 0.203: v42.5,69.25 38,64.75 38,63 U8.19
  Bottom 0.203: v42.5,69.25 43.25,70 43.25,70.5 42.5,71.25 18.75,71.25 17.25,69.75 17.25,68.5 U10.61
MOTE_TX_CTSN_5V  (via drill 0.38)
  Top 0.203: v39.75,50.75 39.75,50.25 39.5,50 v39.5,44.75 | v38.25,52.75 38.25,55.5 37.25,56.5 37.25,57.25 U8.5
  Bottom 0.203: v39.5,44.75 38.25,44.75 IC2.14 | v39.75,50.75 39.75,51.25 v38.25,52.75
MOTE_TX_RTSN_3V  (via drill 0.38)
  Top 0.203: v21.75,60.75 25.75,60.75 26.75,61.75 26.75,62.5 U9.20 | v19.75,62.75 19.75,64 v17.75,66
  Bottom 0.203: v19.75,62.75 v21.75,60.75 | v17.75,66 17.75,66.5 18,66.75 18,68.25 U10.60
MOTE_TX_RTSN_5V  (via drill 0.38)
  Top 0.203: v33,46 31.25,46 30,47.25 28.75,47.25 28,48 28,54.25 26,56.25 26,57 U9.4
  Bottom 0.203: v33,46 33,45.5 34.75,43.75 38,43.75 IC2.13
N$1
  Bottom 0.203: C30.1 47.5,35.5 47.25,35.75 Q1.2 47,36 43.25,39.75 43.25,41 IC2.7
N$2
  Top 1.27: R19.1 171.71,39.4 R20.1
N$3
  Bottom 0.203: 37.75,35.75 37.75,31 C31.1 | 37.75,35.75 42.25,40.25 42.25,41 IC2.8 | 37.75,35.75 Q1.1
N$4
  Top 0.203: 171.75,55 174.5,55 C15.2 | 171.75,55 171.75,55.5 U3.12 | 171.75,55 U3.11
N$6  (via drill 0.38)
  Top 0.203: v54.5,46 55.75,44.75 57.75,44.75 58.25,45.25 64.5,45.25 65.25,46 72.5,46 R8.A1
  Bottom 0.203: v54.5,46 50,46 IC2.40
N$7  (via drill 0.38)
  Top 0.203: v57,46.5 v56,45.5 | v69,45.25 72.5,45.25 R8.B1
  Bottom 0.203: v56,45.5 55.75,45.25 50,45.25 IC2.41 | v57,46.5 60.75,50.25 64,50.25 v69,45.25
N$8  (via drill 0.38)
  Top 0.203: v65.5,45.25 67.25,45.25 68,44.5 72.5,44.5 R8.C1
  Bottom 0.203: v65.5,45.25 58.25,45.25 57.75,44.75 50,44.75 IC2.42
N$10  (via drill 0.38)
  Top 0.203: v54.75,43.75 57.25,41.25 69.25,41.25 71.75,43.75 72.5,43.75 R8.D1
  Bottom 0.203: v54.75,43.75 50,43.75 IC2.43
N$11  (via drill 0.38)
  Top 0.203: v124.25,50.25 122.75,50.25 122,51 C29.2 | 133,52.5 v132,52.5 | 133,52.5 133.25,52.75 U2.12 | 133,52.5 133.25,52.25 U2.11
  Bottom 0.203: v124.25,50.25 129.75,50.25 v132,52.5
N$12  (via drill 0.38)
  Top 0.203: v48.75,42.25 48,42.25 47.5,42.75 47.5,50.25 52.25,55 v54.5,55
  Bottom 0.203: v48.75,42.25 49,42.25 49.75,43 IC2.44 | v54.5,55 55,55.5 55,56.5 R9.A1
N$13  (via drill 0.38)
  Top 0.203: v46,58 v44,56
  Bottom 0.203: v44,56 42.5,54.5 42.5,53 IC2.26 | v46,58 54,58 54.25,57.75 54.25,56.75 R9.B1
N$14
  Bottom 0.203: IC2.36 50,49.5 51.25,49.5 52.75,51 52.75,56.5 R9.D1
N$15
  Top 0.203: C28.2 94,52 92.25,52 91.25,53 U1.12 91.25,52.75 91.25,52.25 U1.11
N$16
  Bottom 0.203: IC2.37 50,48.75 51.25,48.75 53.5,51 53.5,56.5 R9.C1
NEUTRAL
  Top 1.27: R19.2 181.4,39.4 182,40
  Top 3.81: 15.44,4 16,4 | 16,4 71.47,4 | 71.47,4 AC1.1 | AC3.1 116,23.63 116,4 | 116,4 71.47,4 | AC5.1 161,23.63 161,4 | 161,4 116,4 | AC2.1 84.17,92 129,92 | AC4.1 129,71.37 129,92 | AC6.1 174,71.37 174,92 | 174,92 129,92 | 174,92 182,92 182,40 182,4 161,4 | NEUT.P$1 9,11 9,10 9.44,10 R25.2 9.81,10.19 16,4
  Bottom 3.81: U5.2 15,27 10,22 10,13 8,11 NEUT.P$1
RST  (via drill 0.38)
  Top 0.203: v48.25,44.75 49.75,44.75 53.5,48.5 61.25,48.5 61.75,48 62.25,48 62.75,48.5 62.75,50 61.75,51 R6.D1 | v39.25,40 41.5,42.25 41.5,43 42,43.5 45,43.5 v45.75,42.5
  Bottom 0.203: 26,38.5 26,39 24.75,40.25 24.75,43.25 26.25,44.75 28,44.75 29.25,46 JTAG.6 | 26,38.5 26,30 C41.1 | v48.25,44.75 46,42.25 | 46,42.25 45.75,42 45.75,41.25 IC2.4 | 26,38.5 37.75,38.5 v39.25,40 | 46,42.25 v45.75,42.5
RTS#
  Bottom 0.203: C41.2 26.25,28 26.25,25.25 FTDI.6
SCLK  (via drill 0.38)
  Top 0.203: v89.75,48.25 91,48.25 U1.5 | v124.25,48.25 v102.25,48.25 | v130.75,49.25 131.5,49.25 132.5,48.25 133.25,48.25 U2.5 | v165.25,56.25 167.75,53.75 167.75,53.25 170,51 171.5,51 U3.5
  Bottom 0.203: v102.25,48.25 v89.75,48.25 | 128.75,48.25 129.75,48.25 v130.75,49.25 | 128.75,48.25 v124.25,48.25 | v165.25,56.25 162,59.5 141.75,59.5 133.5,51.25 131.75,51.25 128.75,48.25
TCK  (via drill 0.38)
  Top 0.203: v40.25,49 40.25,44.5 38.75,43 v36,43
  Bottom 0.203: v40.25,49 39.25,50 38.25,50 IC2.21 | v36,43 33.25,43 29.75,39.5 28,39.5 26.75,40.75 JTAG.1
TDI
  Bottom 0.203: IC2.24 40.75,53 40.75,55.75 40.25,56.25 36.75,56.25 32.25,51.75 30.5,51.75 29.75,52.5 28,52.5 26.75,51.25 JTAG.9
TDO  (via drill 0.38)
  Top 0.203: v41,50.75 41,44.5 v36,39.5
  Bottom 0.203: IC2.23 40,51.75 v41,50.75 | v36,39.5 30.5,39.5 30,39 26.75,39 25.25,40.5 25.25,42 26.5,43.25 JTAG.3
TMS  (via drill 0.38)
  Top 0.203: v36.75,50.25 36.25,50.25 35.5,51 35,51 33.75,49.75 33.75,45.75 33,45 30.25,45 30,44.75 28,44.75 26.75,46 JTAG.5
  Bottom 0.203: IC2.22 37.5,51 v36.75,50.25
V+  (via drill 0.38)
  Top 0.203: U1.9 91,51 90,51 89,52 89,52.5 90,53.5 91,53.5 U1.13 92,53.5 v95.5,57 | 134.5,53.25 134.5,52.25 | 134.5,52.25 134.5,51.25 134.25,51 133.5,51 U2.9 | 134.5,53.25 134.25,53.5 133.5,53.5 U2.13 | 170.5,53.75 171.5,53.75 U3.9 | 170.5,53.75 170.5,56 170.75,56.25 171.5,56.25 U3.13 | v170.25,53.5 170.5,53.75 | v169,41.75 169,39.75 R20.2 | v156.75,52.25 134.5,52.25 | 134.5,53.25 v134.75,53.5
  Top 0.813: R20.2 164.15,39.45 R21.1 164.1,41.36 C13.1
  Bottom 0.203: 169,52.25 v170.25,53.5 | v169,41.75 169,52.25 | 169,52.25 v156.75,52.25 | v95.5,57 95.5,66 107.75,78.25 112.75,78.25 134.75,56.25 v134.75,53.5
V-  (via drill 0.38)
  Top 0.203: C19.2 174.25,59 174.25,56.75 R37.2 174,56.75 | v173,54.25 171.75,54.25 U3.10 | 174,56.75 v173,55.75 | 174,56.75 171.75,56.75 U3.14 171.5,57 165.25,57 163.5,58.75 148,58.75 143.5,54.25 133.5,54.25 U2.14 133.25,54 132.5,54 131.25,52.75 | v89.75,52.25 90.5,51.5 91,51.5 U1.10 | v89.75,54.25 91,54.25 U1.14 91.25,54.25 v93.25,56.25 | 131.25,52.75 131.25,52.25 132,51.5 133.25,51.5 U2.10 | v107.25,56.25 122.25,56.25 123.25,57.25 126.75,57.25 131.25,52.75
  Bottom 0.203: v173,55.75 v173,54.25 | v89.75,54.25 v89.75,52.25 | v107.25,56.25 v93.25,56.25
XIN  (via drill 0.38)
  Top 0.203: U3.28 163.75,48.5 159.75,44.5 132,44.5 130.75,45.75 125.75,45.75 U2.28 125.5,45.75 106.25,45.75 v105.75,45.25 | v45.5,39.75 v42.5,42.75 | v70.5,41.5 79,41.5 82.75,45.25 | 82.75,45.25 83.25,45.75 U1.28 | 82.75,45.25 v84.75,45.25
  Bottom 0.203: v42.5,42.75 39.25,46 38.25,46 IC2.16 | v45.5,39.75 46.25,39.75 47,39 68,39 v70.5,41.5 | v84.75,45.25 v105.75,45.25

## Text on the board
tPlace: Solder 14AWG / Wire to Exposed / Copper
bPlace: Do not plug into computer / while connected to mains! | Power Strip Monitor / Kevin Weekly | SinBerBEST Project / UC Berkeley